# Altium PCB Current_Sensor.PcbDoc
Units mm, origin at the board's own origin, x right, y up, seen from the top; angles counter-clockwise.
Board outline 73.02 x 30.99 mm, 2 copper layers (VBAT, Bottom Layer); 15 components, 38 nets, 40 pads, 6 vias.
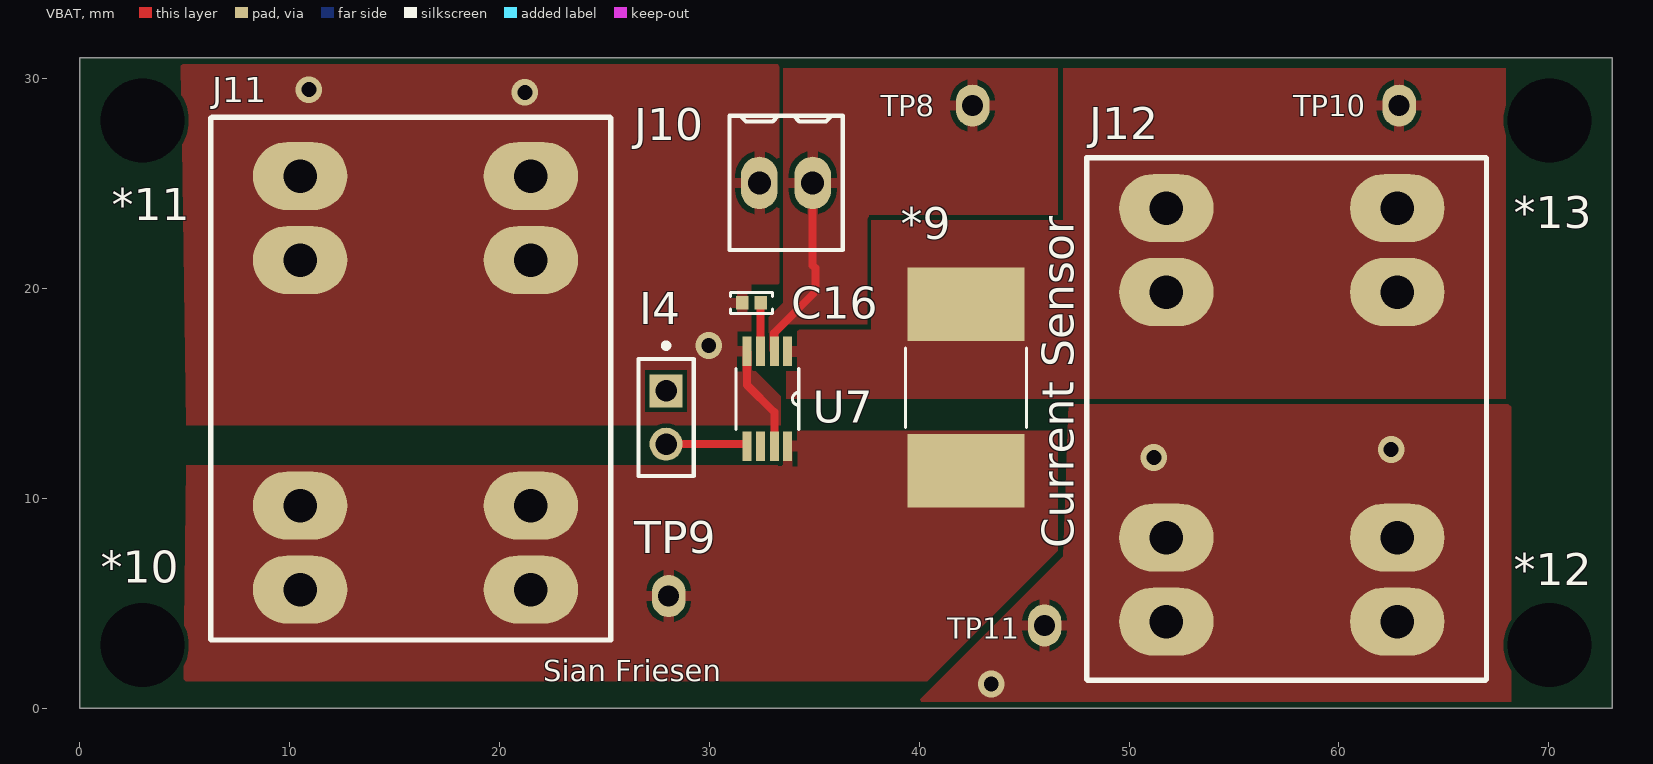
[diagram p0: VBAT view]
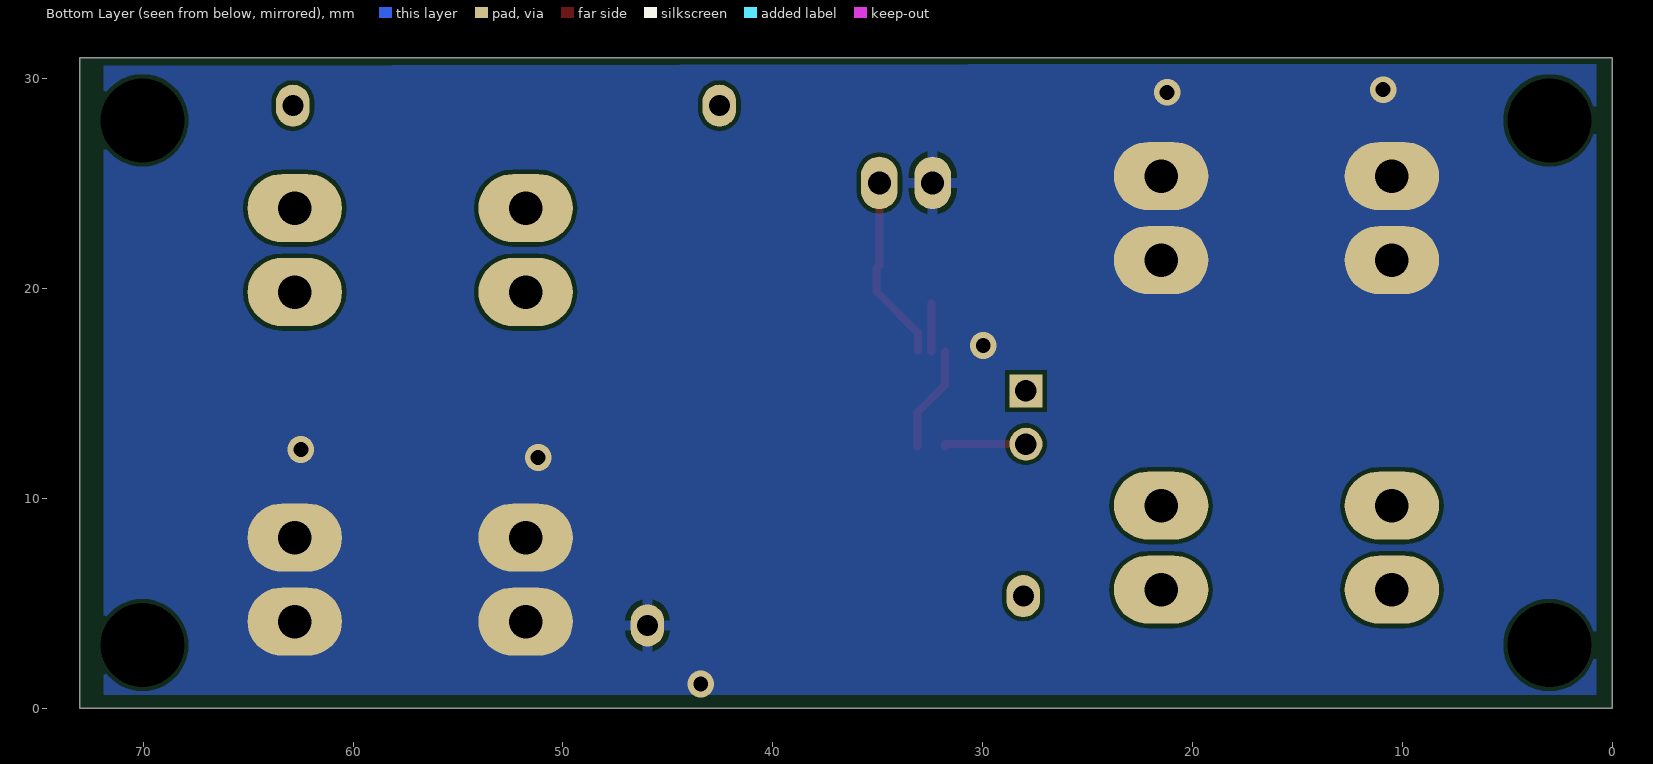
[diagram p1: Bottom Layer view, seen from below]

## Layer stack, top to bottom
Top Solder: solder mask 0.0102, Solder Resist, Dk 3.5
VBAT: signal copper 0.035
Dielectric 1: dielectric 0.32, FR-4, Dk 4.8
Bottom Layer: signal copper 0.035
Bottom Solder: solder mask 0.0102, Solder Resist, Dk 3.5

## Board outline
0,0 73.025,0 73.025,30.988 0,30.988

## Design rules (kind name [scope] priority, off if disabled: settings)
BoardOutlineClearance [All] p1: gap=0.3 ignorepadtopadclearanceinfootprint=FALSE except(0.4: Arc-SplitBarrior Arc-SplitContinuation Track-SplitBarrior Track-SplitContinuation SMDPad-SplitBarrior SMDPad-SplitContinuation THPad-SplitBarrior THPad-SplitContinuation Via-SplitBarrior Via-SplitContinuation Fill-SplitBarrior Fill-SplitContinuation Poly-SplitBarrior Poly-SplitContinuation Region-SplitBarrior Region-SplitContinuation Text-SplitBarrior Text-SplitContinuation)
Clearance "Clearance Different Nets" [All] p1: gap=0.2 ignorepadtopadclearanceinfootprint=FALSE except(0.089: Arc-Arc Arc-Track Arc-SMDPad Track-Track Track-SMDPad; 0.127: SMDPad-SMDPad SMDPad-Via THPad-Via Via-Via; 0.254: Arc-Via Arc-Text Track-Via Track-Text SMDPad-Text THPad-Text Via-Text Fill-Text Poly-Text Region-Text Text-Text; 0.5: THPad-THPad Via-Hole)
Clearance "Clearance Same Nets" [All] p2: gap=0.2 ignorepadtopadclearanceinfootprint=FALSE except(0.089: Arc-Arc Arc-Track Arc-SMDPad Track-Track Track-SMDPad SMDPad-SMDPad; 0.127: SMDPad-Via THPad-Via; 0.254: Arc-Via Arc-Text Track-Via Track-Text SMDPad-Text THPad-Text Via-Via Via-Text Fill-Text Poly-Text Region-Text Text-Text)
Clearance "Clearance Bottom Layer" [OnLayer('Bottom Layer')] p3: gap=0.203 ignorepadtopadclearanceinfootprint=TRUE except(0.254: Arc-Text Track-Text SMDPad-Text THPad-Text Via-Text Fill-Text Poly-Text Region-Text Text-Text)
Clearance "Clearance Top Layer" [OnLayer('Top Layer')] p4: gap=0.203 ignorepadtopadclearanceinfootprint=TRUE except(0.254: Arc-Text Track-Text SMDPad-Text THPad-Text Via-Text Fill-Text Poly-Text Region-Text Text-Text)
HoleSize [All] p1: absolutevalues=TRUE maxlimit=6.3 minlimit=0.2 maxpercent=80.000 minpercent=20.000
MinimumAnnularRing [All] p1: minimumring=0.13
MinimumSolderMaskSliver [All] p1: minsoldermaskwidth=0.1
PolygonConnect PolygonConnect_1 [All] p1: thpad.connectstyle=Relief thpad.reliefconductorwidth=0.508 thpad.reliefentries=4 thpad.polygonreliefangle="90 Angle" thpad.airgapwidth=0.254 smdpad.connectstyle=Relief smdpad.reliefconductorwidth=0.508 smdpad.reliefentries=4 smdpad.polygonreliefangle="90 Angle" smdpad.airgapwidth=0.254 via.connectstyle=Direct via.reliefconductorwidth=0.508 via.reliefentries=4 via.polygonreliefangle="90 Angle" via.airgapwidth=0.254
RoutingCorners [All] p1: cornerstyle=Round minsetback=2.54 maxsetback=2.54
RoutingVias [All] p1: holewidth=0.5 width=1 viastyle="Through Hole" minholewidth=0.2 minwidth=0.35 maxholewidth=1 maxwidth=2
SilkToSilkClearance [All] p1: silktosilkclearance=0.1
SilkToSolderMaskClearance [IsPad] p1: minsilkscreentomaskgap=0.1 clearancetoexposedcopper=TRUE
SolderMaskExpansion [All] p1: expansion=0.102 istentingtop=FALSE
Width [All] p1: maxlimit=2.54 minlimit=0.089 preferedwidth=0.381
25 further rules are at their usual default settings.

## Classes and differential pairs
component class Microcontroller: J3 J7

## Components (designator, comment, footprint, x,y, rotation, side; value= is the part's Value field where it differs from the comment)
*9 "BVS-AR002-1P0" BVS-R002-1P0 42.164,15.24 r270 top
*10 "Mounting_hole" Mounting_Hole#1 6.344,-7.112 r0 top
*11 "Mounting_hole" Mounting_Hole#2 3,28 r0 top
*12 "Mounting_hole" Mounting_Hole#3 70.612,3.048 r0 top
*13 "Mounting_hole" Mounting_Hole#4 70.358,28.194 r0 top
C16 "220 pF" "CAP 0402_1005" 32.004,19.304 r0 top
I4 "M20-9990246" FP-M20-9990246-MFG 27.94,13.843 r270 top
J10 "282834-2" "TE 282834-2" 33.655,25.019 r0 top
J11 "0399200302" 0399200302 16.002,15.494 r180 top
J12 "0399200302" 0399200302 57.277,13.97 r0 top
TP8 "TP_1" TEST_POINT1 42.545,28.702 r90 top
TP9 "TP_1" TEST_POINT1 28.067,5.334 r270 top
TP10 "TP_1" TEST_POINT1 62.865,28.702 r90 top
TP11 "TP_1" TEST_POINT1 45.974,3.937 r90 top
U7 "LT6100IMS8#PBF" SOP65P490X110-8N 32.766,14.732 r270 top

## Footprints (in the part's own frame and the unit in brackets; to place one, negate y for a bottom-side part, rotate by r counter-clockwise, add the part's x,y. Pads: shape width x height; smd on the part's side, far side on the other; paste and mask are expansions set on the pad)
0399200302 [mm] "Connector"
  oval 4.5x3.25 hole 1.6: 1(-5.5,9.85) 1(-5.5,5.85) 1(5.5,9.85) 1(5.5,5.85) 2(-5.5,-5.85) 2(-5.5,-9.85) 2(5.5,-5.85) 2(5.5,-9.85)
  silkscreen extent -9.3,-12.65 9.75,12.25
BVS-R002-1P0 [mil]
  rect 138x219 smd paste+0 mask+0: 1(-157.08,2.69) 2(154.92,2.69)
  silkscreen extent -76,-111 73,116, body extent -204,-106 202,111, height 48
"CAP 0402_1005" [mm] "Chip Capacitor, 2-Leads, Body 1.02x0.51mm, IPC Medium Density"
  rect 0.6x0.64 smd: 1(-0.44,0) 2(0.44,0)
  silkscreen extent -1,-0.5 1,0.5, body extent -0.5,-0.26 0.5,0.26, height 0.52
FP-M20-9990246-MFG [mm]
  rect 1.57x1.57 hole 1.02 paste-1000 mask+0: 1(-1.27,0)
  round 1.57 hole 1.02 paste-1000 mask+0: 2(1.27,0)
  silkscreen extent -3.55,-1.32 2.79,1.32, body extent -2.89,-1.42 2.89,1.42, height 0.25
Mounting_Hole#1 [mil]
  round 60 hole 157.48 unplated: 1(-131.66,398.11)
Mounting_Hole#2 [mil]
  round 60 hole 157.48 unplated: 1(0,0)
Mounting_Hole#3 [mil]
  round 60 hole 157.48 unplated: 1(-22.83,-1.89)
Mounting_Hole#4 [mil]
  round 60 hole 157.48 unplated: 1(-12.83,-7.64)
SOP65P490X110-8N [mil]
  rect 55x17 smd mask+0: 1(-89,38) 2(-89,13) 3(-89,-13) 4(-89,-38) 5(89,-38) 6(89,-13) 7(89,13) 8(89,38)
  silkscreen extent -57,-59 57,59, body extent -59,-96 59,96, height 19
"TE 282834-2" [mm]
  oval 1.75x2.5 hole 1.1: 1(-1.27,0) 2(1.27,0)
  silkscreen extent -2.7,-3.2 2.7,3.2, body extent -2.77,-3.25 2.77,3.25, height 10
TEST_POINT1 [mm]
  oval 2x1.6 hole 1: 1(0,0)

## Part data
C16: library part UMK105CH221JVHF, "CAP CER 220PF 50V CH 0402", Device Package="0402 (1005 Metric)", Manufacturer="Taiyo Yuden", Ratings=AEC-Q200, Supplier Part Number 1=587-5075-1-ND, Temperature Coefficient=CH, Tolerance=±5%, Voltage - Rated=50V, Applications=Automotive, Capacitance="220 pF", ComponentLink2Description="DigiKey Link", ComponentLink2URL=https://www.digikey.com/en/products/detail/taiyo-yuden/UMK105CH221JVHF/6563668, lastupdated="2024-01-28 8:04:19 PM", Lifecycle Status=Active, Minimum Order=1, Mounting Type="Surface Mount, MLCC", Package / Case="0402 (1005 Metric)", Packaging=TapeAndReel, Part Number=UMK105CH221JVHF, Part Status=Active, partid=1938, price=0.01, Series=M, Size / Dimension="0.039\" L x 0.020\" W (1.00mm x 0.50mm)", Supplier 1=DigiKey
I4: library part CMP-15831-000009-1, "CONN HEADER VERT 2POS 2.54MM", Current Rating=3A, Manufacturer=Harwin, Temperature="-40°C to +105°C", Temperature Range High=+105°C, Temperature Range Low=-40°C, Automotive=No, Category=Conn, ComponentLink2Description=Datasheet, ComponentLink2URL=https://cdn.harwin.com/pdfs/M20-999.pdf, Conn Gender=Male, Conn Orientation=Vertical, Contact Material=Tin,Nickel, Device Class L1=Connectors, Device Class L2="Headers and Wire Housings", Device Class L3=unset, Digikey Description="CONN HEADER VERT 2POS 2.54MM", Height=8.99mm, Lead Free=Yes, Manufacturer Part Number=M20-9990246, Mouser Description="2.54mm (0.1\") Pitch SIL Vertical PC Tail Pin Header, 6.1mm mating pin height, tin, 2 contacts", Number of Contacts=2, Number of Rows=1, Octopart=https://octopart.com/m20-9990246-harwin-2590635, Package=M20-9990246, Pitch=2.54mm, RoHS=TRUE
J10: "TERM BLK 2P SIDE ENT 2.54MM PCB", Color=Green, Current=10A, Manufacturer="TE Connectivity AMP Connectors", Supplier Part Number 1=A98333-ND, Voltage=150V, ComponentLink1Description=Datasheet, ComponentLink1URL=https://www.te.com/commerce/DocumentDelivery/DDEController?Action=srchrtrv&DocNm=282834&DocType=Customer+Drawing&DocLang=English, ComponentLink2Description="DigiKey Link", ComponentLink2URL=http://digikey.com/product-detail/en/te-connectivity-amp-connectors/282834-2/A98333-ND/1150135, lastupdated="2020-01-15 4:15:38 AM", Lifecycle Status=Active, Mating Orientation="Horizontal with Board", Minimum Order=1, Mounting Type="Through Hole", Number of Levels=1, Packaging=Bulk, Part Number=282834-2, Part Status=Active, Pitch="0.100\" (2.54mm)", Positions Per Level=2, price=0.88, Series=Buchanan, Supplier 1=DigiKey, Wire Gauge="16-30 AWG", Wire Termination="Screw - Rising Cage Clamp"
TP8 TP9 TP10 TP11: library part Test_point1
U7: library part CMP-353-000000-2, "Precision, Gain Selectable High Side Current Sense Amplifier", Package="MSOP-8 Analog Devices", Check_prices=https://www.snapeda.com/parts/LT6100IMS8%23PBF/Analog+Devices/view-part/?ref=eda, Component Type=Standard, Design Item ID=LT6100IMS8#PBF, MF="Analog Devices", MP=LT6100IMS8#PBF, Pin Count=8, SnapEDA_Link=https://www.snapeda.com/parts/LT6100IMS8%23PBF/Analog+Devices/view-part/?ref=snap, Source=LT6100IMS8#PBF.SchLib

## Via types
v1: diameter 1.27, hole 0.711, VBAT to Bottom Layer, 6 vias

## Nets (pads, with @x,y where several pads share a name; then routed paths per layer and width w, separated by ;. In a path a pad name is that pad's centre, name@x,y a point inside that pad or via, vN(x,y) a via of type N, cw(c..) or ccw(c..) an arc to the next point about the centre after c; other vN are vias at no path point)
+3V3: 
+5V: J10.2 TP8.1 U7.2 | length 8.9
  VBAT w0.381: U7.2@33.091,17.032 33.091,17.874 35.052,19.835 35.052,20.955 34.925,21.082 J10.2
+12V: 
GND: C16.1 J10.1 J11.2 J12.2 TP11.1 U7.4 U7.7 | length 5.1
  VBAT w0.381: U7.4 31.801,15.392 33.096,14.097 U7.7
  other v1: 43.434,1.143 51.181,11.938 62.484,12.319 29.972,17.272 21.209,29.337 10.922,29.464
NetC1_2: 
NetC2_2: 
NetC3_1: 
NetC3_2: 
NetC11_1: 
NetC11_2: 
NetC16_2: C16.2 U7.3 | length 2.3
  VBAT w0.381: U7.3 32.44,16.997 32.44,19.3 C16.2
NetGH1_1: 
NetGL1_1: 
NetI1_1: 
NetI1_2: 
NetI2_1: 
NetI3_1: 
NetI3_2: 
NetI4_2: I4.2 U7.5 | length 3.9
  VBAT w0.381: I4.2 31.775,12.573 31.801,12.548 U7.5
NetJ3_1: 
NetJ3_2: 
NetJ4_2: 
NetJ5_1: 
NetJ5_2: 
NetJ7_1: 
NetL1_1: 
NetR1_2: 
NetR2_1: 
NetR3_2: 
NetR4_2: 
NetR6_2: 
NetR7_2: 
NetR8_2: 
NetR9_2: 
NetR10_2: 
NetR10_3: 
VBAT: *9.1 J12.1 TP10.1 U7.1
VBAT_IN: *9.2 J11.1 TP9.1 U7.8
pads on no net: *10.1 *11.1 *12.1 *13.1 I4.1 U7.6

## Polygon pours and split planes (outlines as drawn)
GND on VBAT "GND_L01_P003" (solid, pour order 3): 4.826,30.734 33.401,30.734 33.401,20.32 33.274,20.193 32.004,20.193 32.004,18.669 32.004,16.256 33.401,14.859 33.401,13.462 33.086,13.462 5.08,13.462
+5V on VBAT "+5V_L01_P002" (solid, pour order 2): 33.528,30.48 46.609,30.48 46.609,23.495 37.592,23.495 37.592,18.288 33.401,18.288 33.401,15.748 32.766,15.748 32.766,18.542 33.528,19.304
VBAT on VBAT "VBAT_L01_P001" (solid, pour order 1): 67.945,30.48 67.945,14.732 33.655,14.732 33.655,18.034 37.719,18.034 37.719,23.241 46.863,23.241 46.863,30.48
VBAT_IN on VBAT "VBAT_IN_L01_P000" (solid, pour order 0): 5.077,11.557 33.731,11.557 33.731,13.208 46.609,13.208 46.609,7.493 40.386,1.27 4.953,1.27
GND on VBAT "GND_L01_P004" (solid, pour order 4): 47.117,14.478 68.072,14.478 68.199,14.351 68.199,0.254 39.878,0.254 46.863,7.239
GND on Bottom Layer "GND_L02_P006" (solid, pour order 6): 0.762,30.742 0.762,0.635 71.882,0.635 71.882,30.6

## Silkscreen, mask and mechanical layers (free items; w line width, h text height)
Top Overlay:
  text "Current Sensor" at 47.371,7.62 h1.52 r90
  text "Sian Friesen" at 22.098,1.27 h1

## Text inside footprints (layer, text, board x,y; h text height)
*9: Mechanical 13 "*" at 43.642,17.503 h1.27 r270